# Altium PCB PCB.PcbDoc
Units mm, origin at the board's own origin, x right, y up, seen from the top; angles counter-clockwise.
Board outline 142.75 x 98.96 mm, 2 copper layers (Top Layer, Bottom Layer); 51 components, 39 nets, 220 pads, 0 vias.
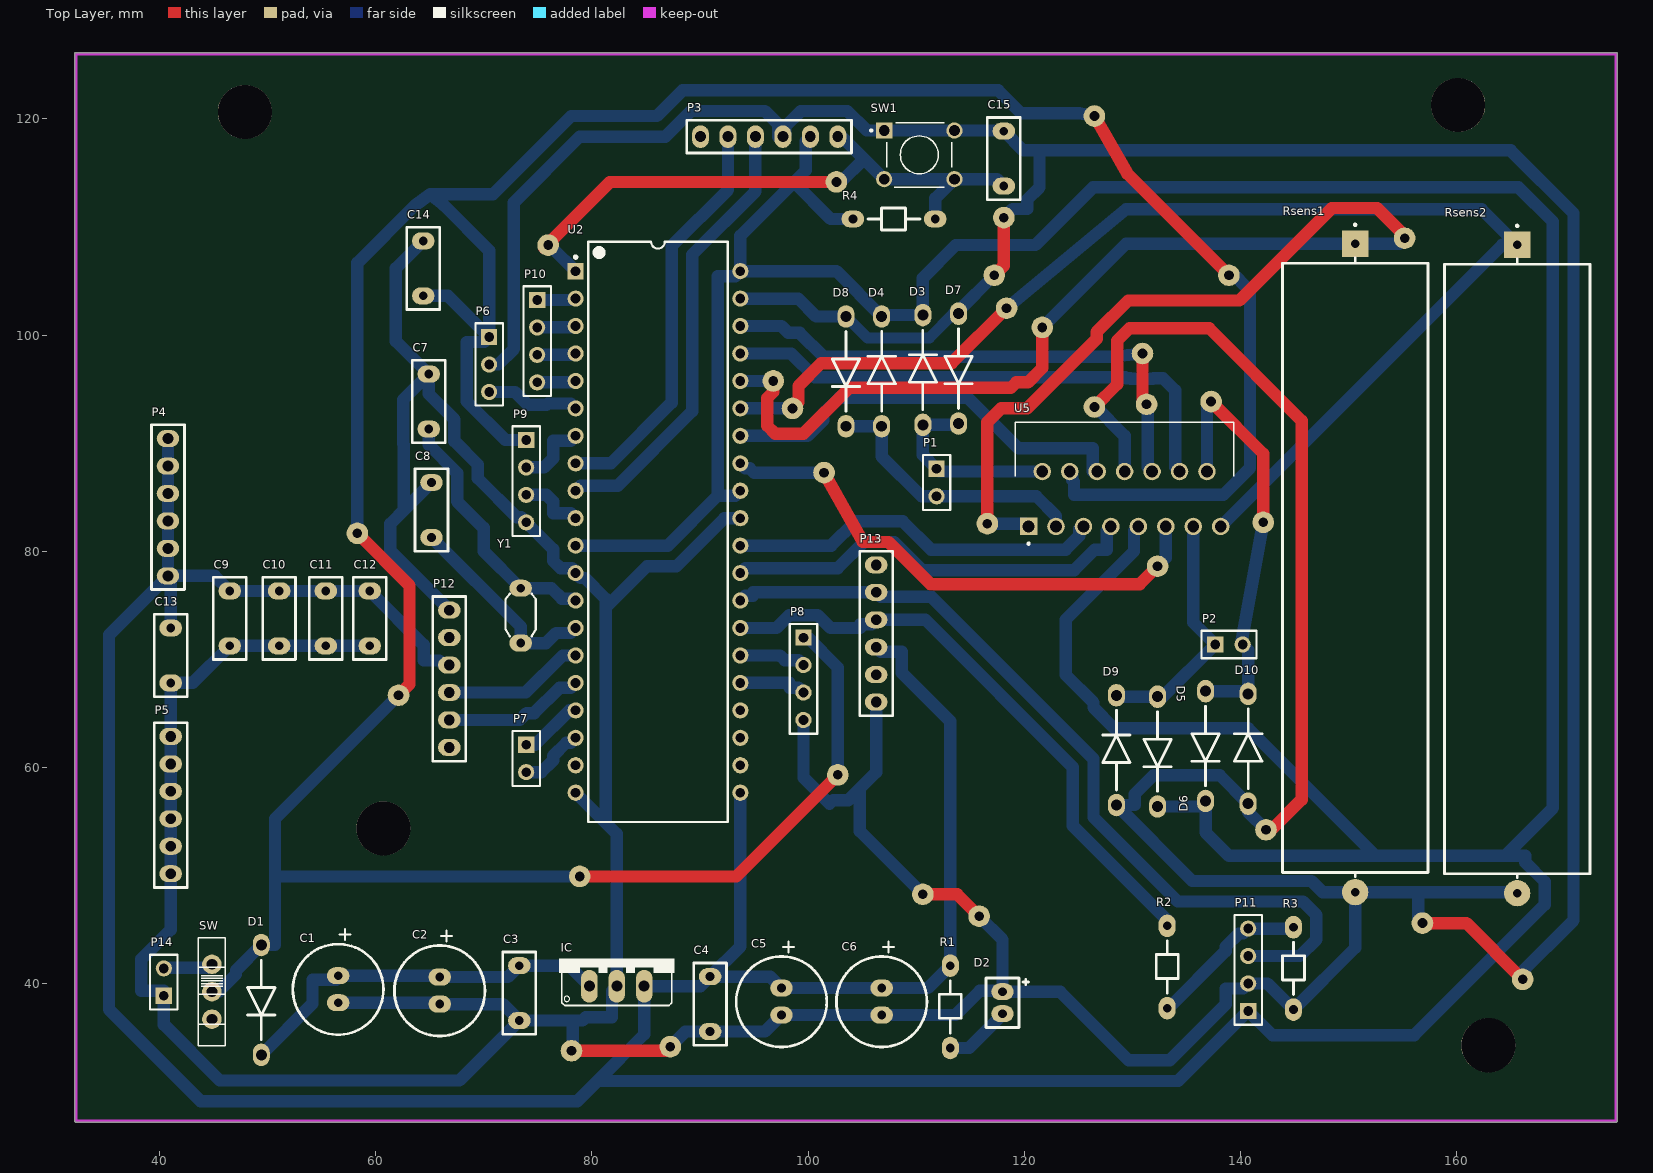
[diagram p0: Top Layer view]
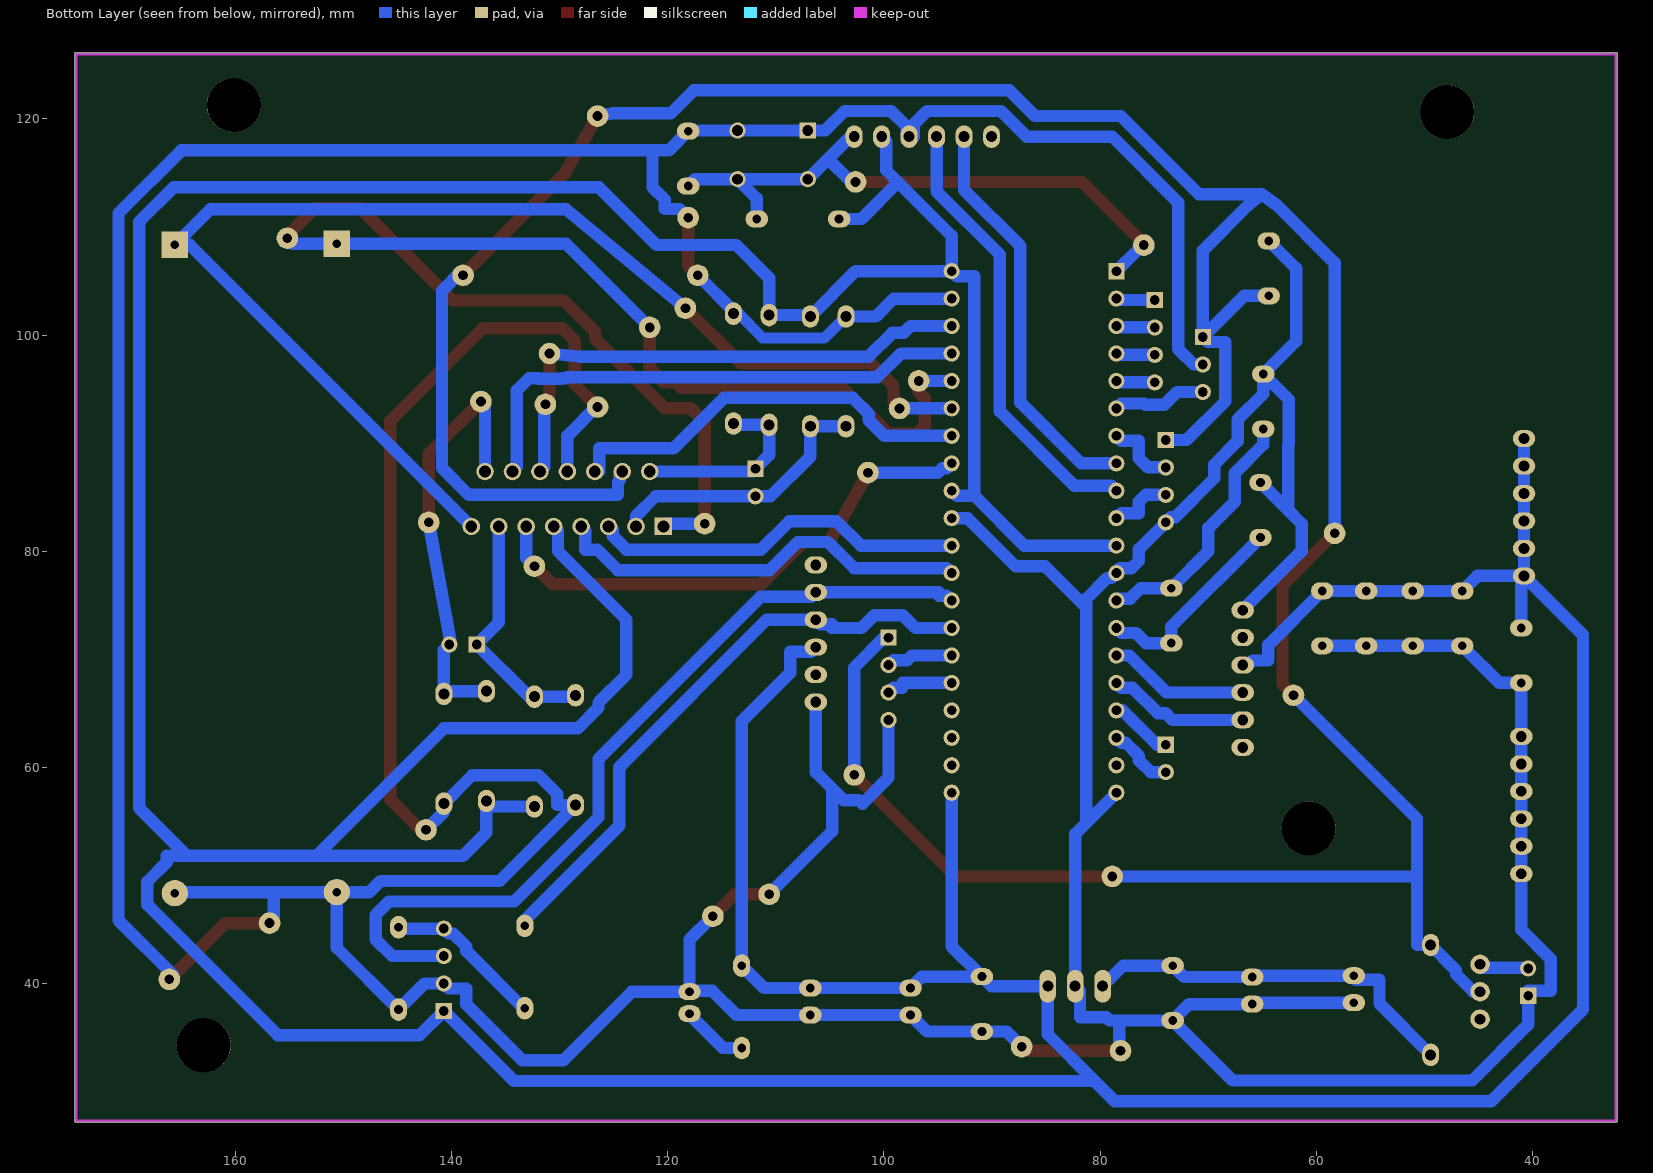
[diagram p1: Bottom Layer view, seen from below]

## Layer stack, top to bottom
Top Solder: solder mask 0.0102, Solder Resist, Dk 3.5
Top Layer: signal copper 0.0356
Dielectric 1: dielectric 0.32, FR-4, Dk 4.8
Bottom Layer: signal copper 0.0356
Bottom Solder: solder mask 0.0102, Solder Resist, Dk 3.5

## Board outline
32.131,27.305 ccw(c32.258,27.305) 32.258,27.178 174.752,27.178 ccw(c174.752,27.305) 174.879,27.305 174.879,126.01 ccw(c174.752,126.01) 174.752,126.137 32.258,126.137 ccw(c32.258,126.01) 32.131,126.01

## Design rules (kind name [scope] priority, off if disabled: settings)
Clearance Clearance_1 [InNet('No Net') And OnLayer('Top Layer') vs InNet('No Net') And OnLayer('Top Layer')] p1: gap=0.254 ignorepadtopadclearanceinfootprint=FALSE
Clearance [All] p2: gap=0.762 ignorepadtopadclearanceinfootprint=FALSE
PolygonConnect [All] p1: connectstyle=Relief reliefconductorwidth=0.254 reliefentries=4 polygonreliefangle="90 Angle" airgapwidth=0.254
RoutingVias [All] p1: holewidth=0.9 width=2 viastyle="Through Hole" minholewidth=0.9 minwidth=2 maxholewidth=0.9 maxwidth=2
SolderMaskExpansion [All] p1: expansion=0.102
Width [All] p1: maxlimit=1.27 minlimit=1.143 preferedwidth=1.194
30 further rules are at their usual default settings.

## Components (designator, comment, footprint, x,y, rotation, side; value= is the part's Value field where it differs from the comment)
C1 "Cap Pol1" rad4 56.515,40.727 r270 top value=470uF
C2 "Cap Pol1" rad4 65.913,40.6 r270 top value=470uF
C3 "Cap" CAP200 73.279,36.576 r90 top value=100nF
C4 "Cap" CAP200 90.932,35.56 r90 top value=100nF
C5 "Cap Pol1" rad4 97.536,39.584 r270 top value=470uF
C6 "Cap Pol1" rad4 106.807,39.584 r270 top value=470uF
C7 "Cap" CAP200 64.897,96.393 r270 top value=33pF
C8 "Cap" CAP200 65.151,86.36 r270 top value=33pF
C9 "Cap" CAP200 46.482,71.247 r90 top value=100nF
C10 "Cap" CAP200 51.054,71.247 r90 top value=100nF
C11 "Cap" CAP200 55.372,71.247 r90 top value=100nF
C12 "Cap" CAP200 59.436,71.247 r90 top value=100nF
C13 "Cap" CAP200 41.021,67.818 r90 top value=100nF
C14 "Cap" CAP200 64.389,108.712 r270 top value=100nF
C15 "Cap" CAP200 118.11,118.872 r270 top value=100nF
D1 "Diode 1N4007" DIODE400 49.403,38.735 r90 top
D2 "LED1" LED_2 118.364,38.227 r270 top
D3 "Diode 1N5402" DIODE400 110.617,96.52 r270 top
D4 "Diode 1N5402" DIODE400 106.807,96.393 r270 top
D5 "Diode 1N5402" DIODE400 132.334,61.722 r90 top
D6 "Diode 1N5402" DIODE400 136.779,62.23 r90 top
D7 "Diode 1N5402" DIODE400 113.919,97.155 r90 top
D8 "Diode 1N5402" DIODE400 103.505,96.901 r90 top
D9 "Diode 1N5402" DIODE400 128.524,61.341 r270 top
D10 "Diode 1N5402" DIODE400 140.716,61.468 r270 top
IC "L7805" 78XXS 82.296,42.291 r0 top
P1 "Motor 1" HDR1X2 111.887,87.63 r270 top
P2 "Motor 2" HDR1X2 137.668,71.374 r0 top
P3 "Programator" HEADER_6 96.393,118.364 r270 top
P4 "5V" HEADER_6 40.767,84.074 r0 top
P5 "GND" HEADER_6 41.021,56.515 r0 top
P6 "GP2Y" HDR1X3 70.485,99.822 r270 top
P7 "Interrupt" HDR1X2 73.914,62.103 r270 top
P8 "HC-SR04_2" HDR1X4 99.568,72.009 r270 top
P9 "HC-SR04_1" HDR1X4 73.914,90.297 r270 top
P10 "S_PINOVI" HDR1X4 74.93,103.251 r270 top
P11 "BT MODUL" HDR1X4 140.716,37.465 r90 top
P12 "UART1" HEADER_6 66.802,68.199 r180 top
P13 "UART2" HEADER_6 106.299,72.39 r0 top
P14 "Napajanje" HDR1X2 40.386,38.862 r90 top
R1 "Res1" res400 113.157,37.846 r90 top value=1K
R2 "Res1" res400 133.223,41.529 r90 top value=4K7
R3 "Res1" res400 144.907,41.402 r90 top value=10K
R4 "Res1" res400 107.95,110.744 r180 top value=10K
Rsens1 "15W" RSENS2 150.749,78.331 r270 top value=5
Rsens2 "15W" RSENS2 165.735,78.232 r270 top value=5
SW "ESP1010" ESP10XX 44.831,39.243 r270 top
SW1 "TASTER" SW_1825910-6-4 110.288,116.677 r0 top
U2 "DSPIC30F4013-20I/P" PDIP600-P40 86.106,81.788 r0 top
U5 "L298N" TO127P2020X500X2100-15 120.396,82.296 r90 top
Y1 "XTAL" OSC_5 73.406,74.422 r0 top

## Footprints (in the part's own frame and the unit in brackets; to place one, negate y for a bottom-side part, rotate by r counter-clockwise, add the part's x,y. Pads: shape width x height; smd on the part's side, far side on the other; paste and mask are expansions set on the pad)
78XXS [mil]
  oval 60x120 hole 40: GND(0,-100) IN(-100,-100) OUT(100,-100)
  silkscreen extent -210,-170 210,0
CAP200 [mil]
  oval 62x82 hole 32: 1(0,0) 2(200,0)
  silkscreen extent -50,-60 250,60
DIODE400 [mil]
  oval 82x62 hole 40: 1(190,0) 2(-210,0)
  silkscreen extent -155,-50 135,50
ESP10XX [mm]
  round 1.8 hole 1: 1(-2.54,0) 2(2.54,0) C(0,0)
  silkscreen extent -5,-1.25 5,1.25
HDR1X2 [mm] "Connector; Header; 2 Position"
  rect 1.5x1.5 hole 0.9: 1(0,0)
  round 1.5 hole 0.9: 2(2.54,0)
  silkscreen extent -1.27,-1.27 3.81,1.27
HDR1X3 [mm] "Connector; Header; 3 Position"
  rect 1.5x1.5 hole 0.9: 1(0,0)
  round 1.5 hole 0.9: 2(2.54,0) 3(5.08,0)
  silkscreen extent -1.27,-1.27 6.35,1.27
HDR1X4 [mm] "Connector; Header; 4 Position"
  rect 1.5x1.5 hole 0.9: 1(0,0)
  round 1.5 hole 0.9: 2(2.54,0) 3(5.08,0) 4(7.62,0)
  silkscreen extent -1.27,-1.27 8.89,1.27
HEADER_6 [mil]
  oval 82x62 hole 39.37: 1(0,250) 2(0,150) 3(0,50) 4(0,-50) 5(0,-150) 6(0,-250)
  silkscreen extent -60,-300 60,300
LED_2 [mil]
  oval 62x82 hole 32: 1(40,-15) 2(-40,-15)
  silkscreen extent -90,-75 90,80, body extent -105,-126 110,106, height 346
OSC_5 [mil]
  oval 82x62 hole 32: 1(0,-115) 2(0,85)
  silkscreen extent -55,-90 55,65, body extent -92,-240 92,207, height 138
PDIP600-P40 [mm] "DIP, 40-Leads, Row Spacing 15.24mm, Pitch 2.54mm, Body 51.8x13.5mm"
  rect 1.5x1.5 hole 0.9: 1(-7.62,24.13)
  round 1.5 hole 0.9: 2(-7.62,21.59) 3(-7.62,19.05) 4(-7.62,16.51) 5(-7.62,13.97) 6(-7.62,11.43) 7(-7.62,8.89) 8(-7.62,6.35) 9(-7.62,3.81) 10(-7.62,1.27) 11(-7.62,-1.27) 12(-7.62,-3.81) 13(-7.62,-6.35) 14(-7.62,-8.89) 15(-7.62,-11.43) 16(-7.62,-13.97) 17(-7.62,-16.51) 18(-7.62,-19.05) 19(-7.62,-21.59) 20(-7.62,-24.13) 21(7.62,-24.13) 22(7.62,-21.59) 23(7.62,-19.05) 24(7.62,-16.51) 25(7.62,-13.97) 26(7.62,-11.43) 27(7.62,-8.89) 28(7.62,-6.35) 29(7.62,-3.81) 30(7.62,-1.27) 31(7.62,1.27) 32(7.62,3.81) 33(7.62,6.35) 34(7.62,8.89) 35(7.62,11.43) 36(7.62,13.97) 37(7.62,16.51) 38(7.62,19.05) 39(7.62,21.59) 40(7.62,24.13)
  silkscreen extent -7.74,-26.85 6.45,26.85, body extent -7.3,-26.85 7.3,26.85, height 6.35
rad4 [mil]
  oval 62x82 hole 32: 1(0,0) 2(98.43,0)
  silkscreen extent -170,-165 215,165
res400 [mil]
  oval 82x62 hole 32: 1(-150,0) 2(150,0)
  silkscreen extent -95,-40 95,40
RSENS2 [mm]
  rect 2.43x2.43 / inner round 2.43 / far side rect 2.43x2.43 hole 0.8: 1(-30.127,-0.127)
  round 2.43 hole 0.8: 2(29.873,-0.127)
  silkscreen extent -31.98,-6.86 28.45,6.6
SW_1825910-6-4 [mm]
  rect 1.498x1.498 hole 0.99: 1(-3.25,2.25)
  round 1.498 hole 0.99: 2(3.25,2.25) 3(-3.25,-2.25) 4(3.25,-2.25)
  silkscreen extent -4.54,-3 3,3
TO127P2020X500X2100-15 [mm]
  rect 1.62x1.62 hole 1.08: 1(0,0)
  round 1.62 hole 1.08: 2(5.08,-1.27) 3(0,-2.54) 4(5.08,-3.81) 5(0,-5.08) 6(5.08,-6.35) 7(0,-7.62) 8(5.08,-8.89) 9(0,-10.16) 10(5.08,-11.43) 11(0,-12.7) 12(5.08,-13.97) 13(0,-15.24) 14(5.08,-16.51) 15(0,-17.78)
  silkscreen extent -1.69,-18.99 9.63,1.21

## Part data
C1 C2 C5 C6: "Polarized Capacitor (Radial)", LatestRevisionDate=17-Jul-2002, LatestRevisionNote="Re-released for DXP Platform.", PackageDescription="Polarized Capacitor (Radial); 2 Leads", PackageReference=RB7.6-15, Published=8-Jun-2000, Publisher="Altium Limited"
C3 C4 C7 C8 C9 C10 C11 C12 C13 C14 C15: "Capacitor", LatestRevisionDate=17-Jul-2002, LatestRevisionNote="Re-released for DXP Platform.", PackageDescription="Radial Cap, Thru-Hole; 2 Leads; 0.3 in Pin Spacing", PackageReference=RAD-0.3, Published=8-Jun-2000, Publisher="Altium Limited"
D1: "1 Amp General Purpose Rectifier", Code_JEDEC=DO-204-AL, ComponentLink1Description="Manufacturer Link", ComponentLink1URL=http://www.fairchildsemi.com/, ComponentLink2Description=Datasheet, ComponentLink2URL=http://www.fairchildsemi.com/ds/1N%2F1N4001.pdf, DatasheetVersion=1998, LatestRevisionDate=17-Jul-2002, LatestRevisionNote="Re-released for DXP Platform.", PackageDescription="Diode, Axial; Body 5.2 x 2.7 mm (LxDia. max), Lead Dia. 0.86 mm (max)", PackageReference=DO-41, PackageVersion=Aug-1999, Published=8-Jun-2000, Publisher="Altium Limited"
D2: "Typical RED GaAs LED", LatestRevisionDate=08-Jul-2005, LatestRevisionNote="Mech Layer 1 removed.", PackageDescription="LED; 2 Leads", PackageReference=LED-1, Published=8-Jun-2000, Publisher="Altium Limited"
D3 D4 D5 D6 D7 D8 D9 D10: "3 Amp General Purpose Rectifier", ComponentLink1Description="Manufacturer Link", ComponentLink1URL=http://www.fairchildsemi.com/, ComponentLink2Description=Datasheet, ComponentLink2URL=http://www.fairchildsemi.com/ds/1N%2F1N5400.pdf, DatasheetVersion=1998, LatestRevisionDate=17-Jul-2002, LatestRevisionNote="Re-released for DXP Platform.", PackageDescription="Diode, Axial; Body 9.5 x 5.6 mm (LxDia. max), Lead Dia. 1.32 mm (max)", PackageReference=DO-201AD, PackageVersion=Aug-1999, Published=8-Jun-2000, Publisher="Altium Limited"
IC: "Linear Voltage Regulator IC 1 Output 1.5A D2PAK", Package="TO-263-3 Inchange Semiconductor", Availability=Unavailable, MF=STMicroelectronics, MP=L7805, Price=None, SnapEDA_Link=https://www.snapeda.com/parts/L7805/STMicroelectronics/view-part/563125/?ref=snap
P1 P2 P7 P14: library part "Header 2", "Header, 2-Pin", LatestRevisionDate=17-Jul-2002, LatestRevisionNote="Re-released for DXP Platform.", Publisher="Altium Limited"
P3 P4 P5 P12 P13: library part "Header 6", "Header, 6-Pin", LatestRevisionDate=17-Jul-2002, LatestRevisionNote="Re-released for DXP Platform.", Publisher="Altium Limited"
P6: library part "Header 3", "Header, 3-Pin", LatestRevisionDate=17-Jul-2002, LatestRevisionNote="Re-released for DXP Platform.", Publisher="Altium Limited"
P8 P9 P10 P11: library part "Header 4", "Header, 4-Pin", LatestRevisionDate=17-Jul-2002, LatestRevisionNote="Re-released for DXP Platform.", Publisher="Altium Limited"
R1 R2 R3 R4: "Resistor", LatestRevisionDate=17-Jul-2002, LatestRevisionNote="Re-released for DXP Platform.", PackageDescription="Axial Device, Thru-Hole; 2 Leads; 0.3 in Pin Spacing", PackageReference=AXIAL-0.3, Published=8-Jun-2000, Publisher="Altium Limited"
Rsens1 Rsens2: library part Res1, "Resistor", LatestRevisionDate=17-Jul-2002, LatestRevisionNote="Re-released for DXP Platform.", PackageDescription="Axial Device, Thru-Hole; 2 Leads; 0.3 in Pin Spacing", PackageReference=AXIAL-0.3, Published=8-Jun-2000, Publisher="Altium Limited"
SW: "Single Phase EMC/EMI Line Filter 10A 250VAC Single Stage Terminal Block", Package=None, Availability=Unavailable, Check_prices=https://www.snapeda.com/parts/ESP1010/Cosel%20USA,%20Inc./view-part/2416539/?ref=eda, MF="Cosel USA,", MP=ESP1010, Price=None, SnapEDA_Link=https://www.snapeda.com/parts/ESP1010/Cosel%20USA,%20Inc./view-part/2416539/?ref=snap
SW1: library part 1825910-6, "Switch Tactile OFF (ON) SPST Round Button PC Pins 0.05A 24VDC 100000Cycles 1.57N Thru-Hole Loose", Package=None, Availability=Unavailable, MP=1825910-6, Price=None
U2: "High-Performance 16-bit Digital Signal Controller, 48 KB Flash, 2 KB SRAM, 1 KB EEPROM, 40-Pin PDIP, Industrial Temperature", Supplier Part Number 1=DSPIC30F4013-20IP-ND, ComponentLink1Description=Datasheet, ComponentLink1URL=http://ww1.microchip.com/downloads/en/DeviceDoc/70138F.pdf, ComponentLink2Description="Packaging Specification", ComponentLink2URL=http://www.microchip.com/stellent/groups/techpub_sg/documents/packagingspec/en012702.pdf, ComponentLink3Description="Microchip.com Home", ComponentLink3URL=http://www.microchip.com/, DatasheetVersion="revF, Apr-2008", PackageDescription="40-Lead Plastic Dual In-Line (P) - 600 mil Body [PDIP]", PackageReference=PDIP600-P40, PackageVersion="revBB, Aug-2009", Published=29-Jan-2009, Publisher="Altium Limited", Supplier 1=Digi-Key, Supplier 2=Farnell, Supplier Part Number 2=1439755
U5: "Dual Full Bridge Motor Driver 15-Pin(15+Tab) MULTIWATT V Tube", Package=None, Availability=Unavailable, MP=L298N, Price=None
Y1: "Crystal Oscillator", LatestRevisionDate=17-Jul-2002, LatestRevisionNote="Re-released for DXP Platform.", PackageDescription="Crystal, Thru-Hole; 2 Leads; Body 3.1 x 8.2 mm (Dia.xH)", PackageReference=R38, Published=8-Jun-2000, Publisher="Altium Limited"

## Free pads (board coordinates)
  round 5 hole 5: ""(47.879,120.65) ""(60.706,54.356) ""(160.147,121.285) ""(162.941,34.29)
  round 2 hole 0.9: ""(58.293,81.661) ""(62.103,66.675) ""(75.946,108.331) ""(78.105,33.782) ""(78.867,49.911) ""(87.249,34.163) ""(96.774,95.758) ""(98.552,93.218) ""(101.473,87.276) ""(102.616,114.173) ""(102.743,59.309) ""(110.617,48.26) ""(115.824,46.228) ""(116.586,82.55) ""(117.221,105.537) ""(118.11,110.871) ""(118.364,102.489) ""(121.666,100.711) ""(126.492,93.345) ""(126.492,120.269) ""(130.937,98.298) ""(131.318,93.599) ""(132.334,78.613) ""(137.287,93.853) ""(138.938,105.537) ""(142.113,82.677) ""(142.367,54.229) ""(155.194,108.966) ""(156.845,45.593) ""(166.116,40.386)

## Nets (pads, with @x,y where several pads share a name; then routed paths per layer and width w, separated by ;. In a path a pad name is that pad's centre, name@x,y a point inside that pad or via, vN(x,y) a via of type N, cw(c..) or ccw(c..) an arc to the next point about the centre after c; other vN are vias at no path point)
+5V: C4.2 C5.1 C6.1 C9.2 C10.2 C11.2 C12.2 C13.2 D3.2 D4.2 D5.2 D6.2 IC.OUT P3.2 P4.1 P4.2 P4.3 P4.4 P4.5 P4.6 P11.1 P12.4 P13.4 R1.2 R4.2 U2.11 U2.21 U2.32 U2.40 U5.9 | length 631.6
  Bottom Layer w1.143: P4.1 P4.2 P4.3 P4.4 P4.5 P4.6 ; C13.2 41.021,77.47 P4.6 ; P12.4 66.294,69.469 65.875,69.888 64.427,69.888 64.427,71.336 C12.2 C11.2 C10.2 C9.2 45.085,77.724 P4.6 ; U2.11 87.019,80.518 91.642,85.142 ; U2.21 93.726,43.434 C4.2 ; U2.32 93.27,85.142 91.642,85.142 ; P3.2 99.784,117.945 99.784,115.251 98.679,114.146 ; R4.2 102.081,110.744 98.679,114.146 ; P13.4 106.718,70.701 108.674,70.701 108.674,68.745 113.157,64.262 R1.2 111.085,39.584 C6.1 C5.1 96.48,40.64 C4.2 ; U5.9 130.16,81.9 130.16,79.998 123.825,73.664 123.825,68.576 126.403,65.998 126.403,65.542 128.319,63.627 140.716,63.627 152.527,51.816 ; D5.2 136.271,56.388 D6.2 136.779,53.975 138.938,51.816 152.527,51.816 ; P4.6 35.306,72.263 35.306,37.592 43.777,29.121 78.651,29.121 80.518,30.988 ; 80.518,30.988 84.836,35.306 IC.OUT 90.043,39.751 C4.2 ; 80.518,30.988 134.239,30.988 P11.1 142.964,35.217 156.07,35.217 168.157,47.303 168.157,49.415 166.37,51.201 166.37,51.816 164.465,51.816 ; 91.642,85.142 91.642,105.462 93.27,105.462 U2.40 ; U2.40 102.616,105.918 D4.2 106.934,101.854 D3.2 110.617,105.283 113.665,108.331 121.031,108.331 126.365,113.665 165.735,113.665 168.91,110.49 168.91,56.261 164.465,51.816 ; U2.40 93.726,109.193 98.679,114.146 ; 152.527,51.816 164.465,51.816
GND: C1.2 C2.2 C3.1 C4.1 C5.2 C6.2 C7.1 C8.1 C9.1 C10.1 C11.1 C12.1 C13.1 C14.1 C15.1 D2.2 D7.1 D8.1 D9.1 D10.1 IC.GND P3.3 P5.1 P5.2 P5.3 P5.4 P5.5 P5.6 P6.2 P8.4 P9.4 P11.2 P12.6 P13.6 P14.1 pad.@78.105,33.782 pad.@87.249,34.163 pad.@110.617,48.26 pad.@115.824,46.228 pad.@117.221,105.537 pad.@118.11,110.871 pad.@126.492,93.345 pad.@142.367,54.229 pad.@156.845,45.593 pad.@166.116,40.386 R3.1 Rsens1.2 Rsens2.2 SW1.1 SW1.2 U2.12 U2.20 U2.31 U2.39 U5.8 | length 776
  Top Layer w1.143: pad.@78.105,33.782 86.868,33.782 pad.@87.249,34.163 ; pad.@110.617,48.26 113.792,48.26 pad.@115.824,46.228 ; pad.@117.221,105.537 118.11,106.426 pad.@118.11,110.871 ; pad.@126.492,93.345 128.603,95.456 128.603,99.493 129.742,100.632 137.112,100.632 145.669,92.075 145.669,57.023 pad.@142.875,54.229 ; pad.@156.845,45.593 160.909,45.593 pad.@166.116,40.386
  Bottom Layer w1.016: D8.1 105.499,99.733 111.211,99.733 D7.1@113.459,101.981
  Bottom Layer w1.143: C1.2 65.786,38.227 C2.2 71.755,38.1 C3.1 ; C12.1 C11.1 C10.1 C9.1 43.053,67.818 C13.1 P5.1 P5.2 P5.3 P5.4 P5.5 P5.6 41.021,44.984 38.302,42.265 38.302,39.318 40.386,39.318 P14.1 40.386,36.195 45.555,31.026 67.729,31.026 C3.1 ; C14.1 61.849,106.172 61.849,99.441 C7.1 ; C8.1 62.738,83.947 ; P12.6 61.341,80.01 61.341,82.55 62.738,83.947 ; P6.2 71.331,97.282 72.771,98.722 72.771,112.268 78.867,118.364 86.79,118.364 89.164,120.739 96.002,120.739 97.244,119.497 97.244,118.364 P3.3 97.879,118.58 97.879,119.293 99.324,120.739 103.622,120.739 105.433,118.927 SW1.1 SW1.2 118.055,118.927 C15.1 119.888,117.094 121.412,117.094 ; pad.@78.105,33.782 78.232,33.909 78.232,36.576 ; U2.20 81.216,54.927 ; pad.@87.249,34.163 88.646,35.56 C4.1 96.012,35.56 C5.2 C6.2 113.648,37.084 115.896,39.332 D2.2@117.983,39.332 ; U2.31 92.253,83.058 87.808,78.613 85.09,78.613 81.28,74.803 ; U2.39 99.087,103.378 100.738,101.727 D8.1 ; P8.4 99.568,59.055 101.981,56.642 102.314,56.975 103.71,56.975 104.773,58.039 ; P13.6 106.299,59.565 104.773,58.039 ; pad.@110.617,48.26 104.773,54.104 104.773,58.039 ; D7.1@113.459,101.981 D7.1 113.919,102.235 pad.@117.221,105.537 ; pad.@115.697,46.355 115.824,46.228 117.983,44.069 D2.2@117.983,39.332 ; pad.@118.11,110.871 118.91,111.671 120.268,111.671 120.268,112.521 121.412,113.665 121.412,117.094 ; pad.@126.492,93.472 129.286,90.678 U5.8 ; pad.@142.367,54.229 140.716,55.88 D10.1 138.087,59.271 131.963,59.271 130.213,57.521 130.213,56.515 D9.1 135.547,49.492 146.575,49.492 147.608,48.458 Rsens1.2 ; pad.@156.845,45.593 156.464,45.974 156.464,48.458 ; Rsens2.2 165.509,48.458 156.464,48.458 ; pad.@165.735,40.767 170.815,45.847 170.815,111.279 165,117.094 121.412,117.094 ; 62.738,83.947 62.581,84.104 62.581,89.867 62.522,89.926 62.522,94.018 C7.1 ; C7.1 64.897,94.566 67.272,92.192 67.272,90.187 69.431,88.028 69.431,86.754 73.051,83.133 73.458,83.133 P9.4 76.402,80.189 76.402,79.123 77.091,78.434 78.157,78.434 78.486,78.105 U2.12 78.942,77.522 79.349,77.522 81.28,75.591 81.28,74.803 ; C3.1 78.232,36.576 ; 78.232,36.576 79.121,36.576 79.438,36.893 81.852,36.893 81.852,39.306 IC.GND 82.296,53.848 81.216,54.927 ; 81.216,54.927 81.28,54.991 81.28,74.803 ; D2.2@117.983,39.332 D2.2 123.317,39.243 129.667,32.893 133.45,32.893 138.632,38.076 138.632,39.549 140.26,39.549 P11.2 142.494,40.005 R3.1 150.622,43.307 Rsens1.2 ; Rsens1.2 156.464,48.458
INT0: P7.1 U2.17 | length 5.9
  Bottom Layer w1.143: P7.1 74.75,62.103 77.925,65.278 U2.17
INT2: P7.2 U2.18 | length 6.1
  Bottom Layer w1.143: P7.2 75.311,59.563 76.402,60.654 76.402,61.061 77.623,62.282 78.03,62.282 U2.18
MCLR: C15.2 P3.1 pad.@75.946,108.331 pad.@102.616,114.173 R4.1 SW1.3 SW1.4 U2.1 | length 58.5
  Top Layer w1.143: pad.@75.565,108.077 81.661,114.173 pad.@102.616,114.173
  Bottom Layer w1.143: pad.@75.565,108.077 76.327,108.077 U2.1 ; pad.@102.616,114.173 103.02,114.173 105.156,116.309 ; P3.1 103.101,118.364 105.156,116.309 ; R4.1 111.76,112.649 SW1.4 ; C15.2 117.475,114.427 SW1.4 ; 105.156,116.309 SW1.3 SW1.4
NetC1_1: C1.1 C2.1 C3.2 D1.2 IC.IN | length 36.1
  Bottom Layer w1.143: D1.2 54.14,38.138 54.14,40.348 56.35,40.348 56.515,40.513 C1.1 65.786,40.727 C2.1 72.223,40.6 C3.2 77.851,41.656 IC.IN
NetD2_1: D2.1 R1.1 | length 6.1
  Bottom Layer w1.143: R1.1 114.897,34.036 D2.1@117.983,37.122
NetP11_4: P11.4 R2.1 R3.2 | length 15
  Bottom Layer w1.143: R2.1 133.35,37.719 138.632,43.001 138.632,43.408 139.853,44.629 140.26,44.629 P11.4 144.78,45.085 R3.2
NetP14_2: P14.2 SW.1 | length 4.6
  Bottom Layer w1.143: P14.2 40.386,41.477 44.525,41.477 SW.1
OSC1: C7.2 U2.13 Y1.2 | length 23.8
  Bottom Layer w1.143: C7.2 64.897,89.867 67.526,87.239 67.526,84.62 69.977,82.169 69.977,80.01 Y1.2 76.25,76.581 77.214,75.617 78.307,75.617 U2.13
OSC2: C8.2 U2.14 Y1.1 | length 18.9
  Bottom Layer w1.143: C8.2 73.406,73.025 Y1.1 75.742,71.501 76.682,72.442 78.03,72.442 U2.14
OUT1: D3.1 D7.2 P1.1 U5.2 | length 17.8
  Bottom Layer w1.143: D7.2 113.792,91.694 D3.1 110.617,88.9 P1.1 112.141,87.376 U5.2
OUT2: D4.1 D8.2 P1.2 U5.3 | length 25.5
  Bottom Layer w1.143: D8.2 D4.1 106.807,88.773 110.49,85.09 P1.2 121.108,85.09 122.936,83.262 U5.3
OUT3: D5.1 D9.2 P2.1 U5.13 | length 23
  Bottom Layer w1.143: D9.2 128.651,66.548 D5.1 132.842,66.548 P2.1 135.636,73.406 U5.13
OUT4: D6.1 D10.2 P2.2 pad.@137.287,93.853 pad.@142.113,82.677 U5.14 | length 40.2
  Top Layer w1.143: pad.@137.287,93.853 142.113,89.027 pad.@142.113,82.677
  Bottom Layer w1.143: D6.1 140.462,67.056 D10.2 140.716,70.866 P2.2 140.081,71.501 pad.@142.113,82.677 ; U5.14 136.906,93.472 pad.@137.287,93.853
PGC: P3.5 U2.8 | length 38
  Bottom Layer w1.143: U2.8 81.761,88.138 87.376,93.753 87.376,108.231 92.583,113.438 P3.5
PGD: P3.4 U2.9 | length 41.7
  Bottom Layer w1.143: U2.9 78.942,86.054 82.371,86.054 89.281,92.964 89.281,107.442 95.123,113.284 P3.4
PWM1: U2.34 U5.6 | length 38.9
  Bottom Layer w1.143: U2.34 99.949,90.678 101.384,92.113 101.384,92.7 102.88,94.196 114.798,94.196 119.474,89.52 126.35,89.52 126.35,87.376 U5.6
PWM2: pad.@101.473,87.276 pad.@132.334,78.613 U2.33 U5.11 | length 49
  Top Layer w1.143: pad.@101.473,87.276 105.067,80.861 107.432,80.861 111.33,76.962 130.683,76.962 pad.@132.334,78.613
  Bottom Layer w1.143: U2.33 94.182,87.682 94.589,87.682 95.022,87.249 pad.@101.473,87.276 ; pad.@132.334,78.613 133.096,79.375 U5.11
RB0: P10.1 U2.2 | length 3.6
  Bottom Layer w1.143: P10.1 78.359,103.251 U2.2
RB1: P10.2 U2.3 | length 3.6
  Bottom Layer w1.143: P10.2 78.359,100.711 U2.3
RB2: P10.3 U2.4 | length 3.6
  Bottom Layer w1.143: P10.3 78.359,98.171 U2.4
RB3: P10.4 U2.5 | length 3.6
  Bottom Layer w1.143: P10.4 78.359,95.631 U2.5
RB4: P6.3 U2.6 | length 8.7
  Bottom Layer w1.143: P6.3 72.872,94.742 74.067,93.547 75.793,93.547 75.92,93.674 78.03,93.674 U2.6
RB5: P9.2 U2.7 | length 6.7
  Bottom Layer w1.143: P9.2 75.565,87.757 76.402,88.594 76.402,90.222 78.03,90.222 U2.7
RB8: P9.3 U2.10 | length 6.1
  Bottom Layer w1.143: P9.3 75.783,85.217 76.402,84.597 76.402,83.514 78.03,83.514 U2.10
RB9: pad.@130.937,98.298 pad.@131.318,93.599 U2.38 U5.10 | length 49.7
  Top Layer w1.143: pad.@130.937,98.298 130.937,93.98 pad.@131.318,93.599
  Bottom Layer w1.143: U2.38 97.536,100.838 98.171,100.203 99.214,100.203 101.411,98.006 128.054,98.006 pad.@130.937,98.298 ; pad.@131.318,93.599 131.43,93.487 131.43,87.772 U5.10
RB10: U2.37 U5.12 | length 49.4
  Bottom Layer w1.143: U2.37 98.425,98.298 100.622,96.101 126.93,96.101 126.939,96.093 129.334,96.093 129.415,96.012 129.796,96.012 129.843,95.964 131.904,95.964 131.951,96.012 132.842,96.012 133.97,94.884 133.97,87.772 U5.12
RB11: pad.@96.774,95.758 pad.@116.586,82.55 pad.@121.666,100.711 pad.@155.194,108.966 Rsens1.1 U2.36 U5.1 | length 137.9
  Top Layer w1.143: pad.@96.774,95.758 96.774,94.74 96.218,94.185 96.218,91.615 96.949,90.884 99.569,90.884 103.808,95.123 118.745,95.123 119.253,95.631 120.345,95.631 121.666,96.952 pad.@121.666,100.711 ; pad.@116.586,82.55 116.586,91.948 117.856,93.218 120.269,93.218 126.698,99.647 126.698,100.282 129.619,103.203 139.905,103.203 148.461,111.76 152.654,111.76 pad.@155.194,109.22
  Bottom Layer w1.143: U2.36 pad.@96.774,95.758 ; pad.@116.586,82.55 120.142,82.55 U5.1 ; pad.@121.666,100.711 129.413,108.458 Rsens1.1 154.686,108.458 pad.@155.194,108.966
RB12: pad.@98.552,93.218 pad.@118.364,102.489 Rsens2.1 U2.35 U5.15 | length 119.5
  Top Layer w1.143: pad.@98.552,93.218 99.108,93.774 99.108,95.298 101.219,97.409 113.284,97.409 pad.@118.364,102.489
  Bottom Layer w1.143: U2.35 pad.@98.552,93.218 ; pad.@118.364,102.489 129.413,111.633 162.334,111.633 Rsens2.1 164.239,108.359 U5.15
RF0: U2.30 U5.5 | length 34.5
  Bottom Layer w1.143: U2.30 102.13,80.518 104.377,82.766 108.755,82.766 111.368,80.152 123.824,80.152 125.08,81.408 U5.5@125.08,82.057
RF1: U2.29 U5.7 | length 39.3
  Bottom Layer w1.143: U2.29 94.182,78.434 102.74,78.434 105.166,80.861 107.965,80.861 110.579,78.247 124.613,78.247 126.518,80.152 127.62,80.152 127.62,81.9 U5.7
RF2: P8.2 U2.26 | length 6.2
  Bottom Layer w1.143: U2.26 97.401,70.358 97.833,69.925 99.112,69.925 P8.2
RF3: P8.3 U2.25 | length 6.5
  Bottom Layer w1.143: U2.25 98.272,67.818 98.272,67.385 99.112,67.385 P8.3
U1ARX: P12.2 U2.16 | length 13.1
  Bottom Layer w1.143: P12.2 73.322,64.389 73.957,65.024 74.653,65.024 76.991,67.362 78.03,67.362 U2.16
U1ATX: P12.3 U2.15 | length 13.1
  Bottom Layer w1.143: P12.3 73.864,66.929 77.293,70.358 U2.15
U2RX: P11.3 P13.2 U2.28 | length 78.5
  Bottom Layer w1.143: U2.28 94.182,75.894 94.895,75.894 94.895,76.2 P13.2 106.718,75.781 111.417,75.781 126.403,60.795 126.403,55.382 134.199,47.587 145.786,47.587 147.028,46.345 147.028,44.079 145.493,42.545 P11.3
U2TX: P13.3 R2.2 U2.27 | length 55.9
  Bottom Layer w1.143: U2.27 97.071,72.898 98.266,74.093 100.87,74.093 102.065,72.898 104.824,72.898 104.824,73.241 105.88,73.241 P13.3 110.844,73.66 124.498,60.006 124.498,54.593 R2.2@133.41,45.682
VCC: C14.2 D1.1 P6.1 P8.1 P9.1 pad.@58.293,81.661 pad.@62.103,66.675 pad.@78.867,49.911 pad.@102.743,59.309 pad.@126.492,120.269 pad.@138.938,105.537 SW.C U5.4 | length 320
  Top Layer w1.143: pad.@58.293,81.661 63.119,76.835 63.119,67.691 pad.@62.103,66.675 ; pad.@78.867,49.911 93.345,49.911 pad.@102.743,59.309 ; pad.@126.492,120.269 129.54,114.935 pad.@138.938,105.537
  Bottom Layer w1.143: SW.C 45.45,39.243 47.065,40.858 47.065,41.223 D1.1 50.673,43.561 50.673,49.911 ; pad.@58.293,81.661 58.293,106.68 63.627,112.014 65.024,113.03 ; pad.@62.103,66.675 50.673,55.245 50.673,49.911 ; C14.2 66.675,103.632 P6.1 ; P9.1 71.983,90.297 68.401,93.879 68.401,99.366 70.029,99.366 P6.1 ; pad.@78.867,49.911 50.673,49.911 ; P8.1 99.975,72.009 102.743,69.241 pad.@102.743,59.309 ; U5.4 124.445,87.137 124.445,86.587 124.602,86.429 124.602,85.232 138.418,85.232 140.893,87.707 140.893,104.09 pad.@139.065,105.918 ; pad.@126.492,120.269 125.095,120.523 119.712,120.523 117.592,122.644 88.375,122.644 86.001,120.269 78.078,120.269 70.839,113.03 65.024,113.03 ; 65.024,113.03 66.294,112.014 70.485,107.823 P6.1
pads on no net: P3.6 P12.1 P12.5 P13.1 P13.5 SW.2 U2.19 U2.22 U2.23 U2.24

## Keep-outs
Keep-Out Layer:
  lines w0.254: 32.258,27.305 32.258,126.01 174.752,126.01 174.752,27.305 32.258,27.305

## Text inside footprints (layer, text, board x,y; h text height)
IC: Mechanical 13 "O" at 84.202,38.478 h0.76; Mechanical 13 "I" at 79.117,38.476 h0.76; Mechanical 13 "-" at 81.661,38.479 h0.76